# Altium PCB roneMotorBoard-v14.PcbDoc (part 1 of 2)
Units mil, origin at the board's own origin, x right, y up, seen from the top; angles counter-clockwise.
Board outline 3702 x 3936.38 mil, 2 copper layers (Top Layer, Bottom Layer); 104 components, 88 nets, 401 pads, 261 vias.
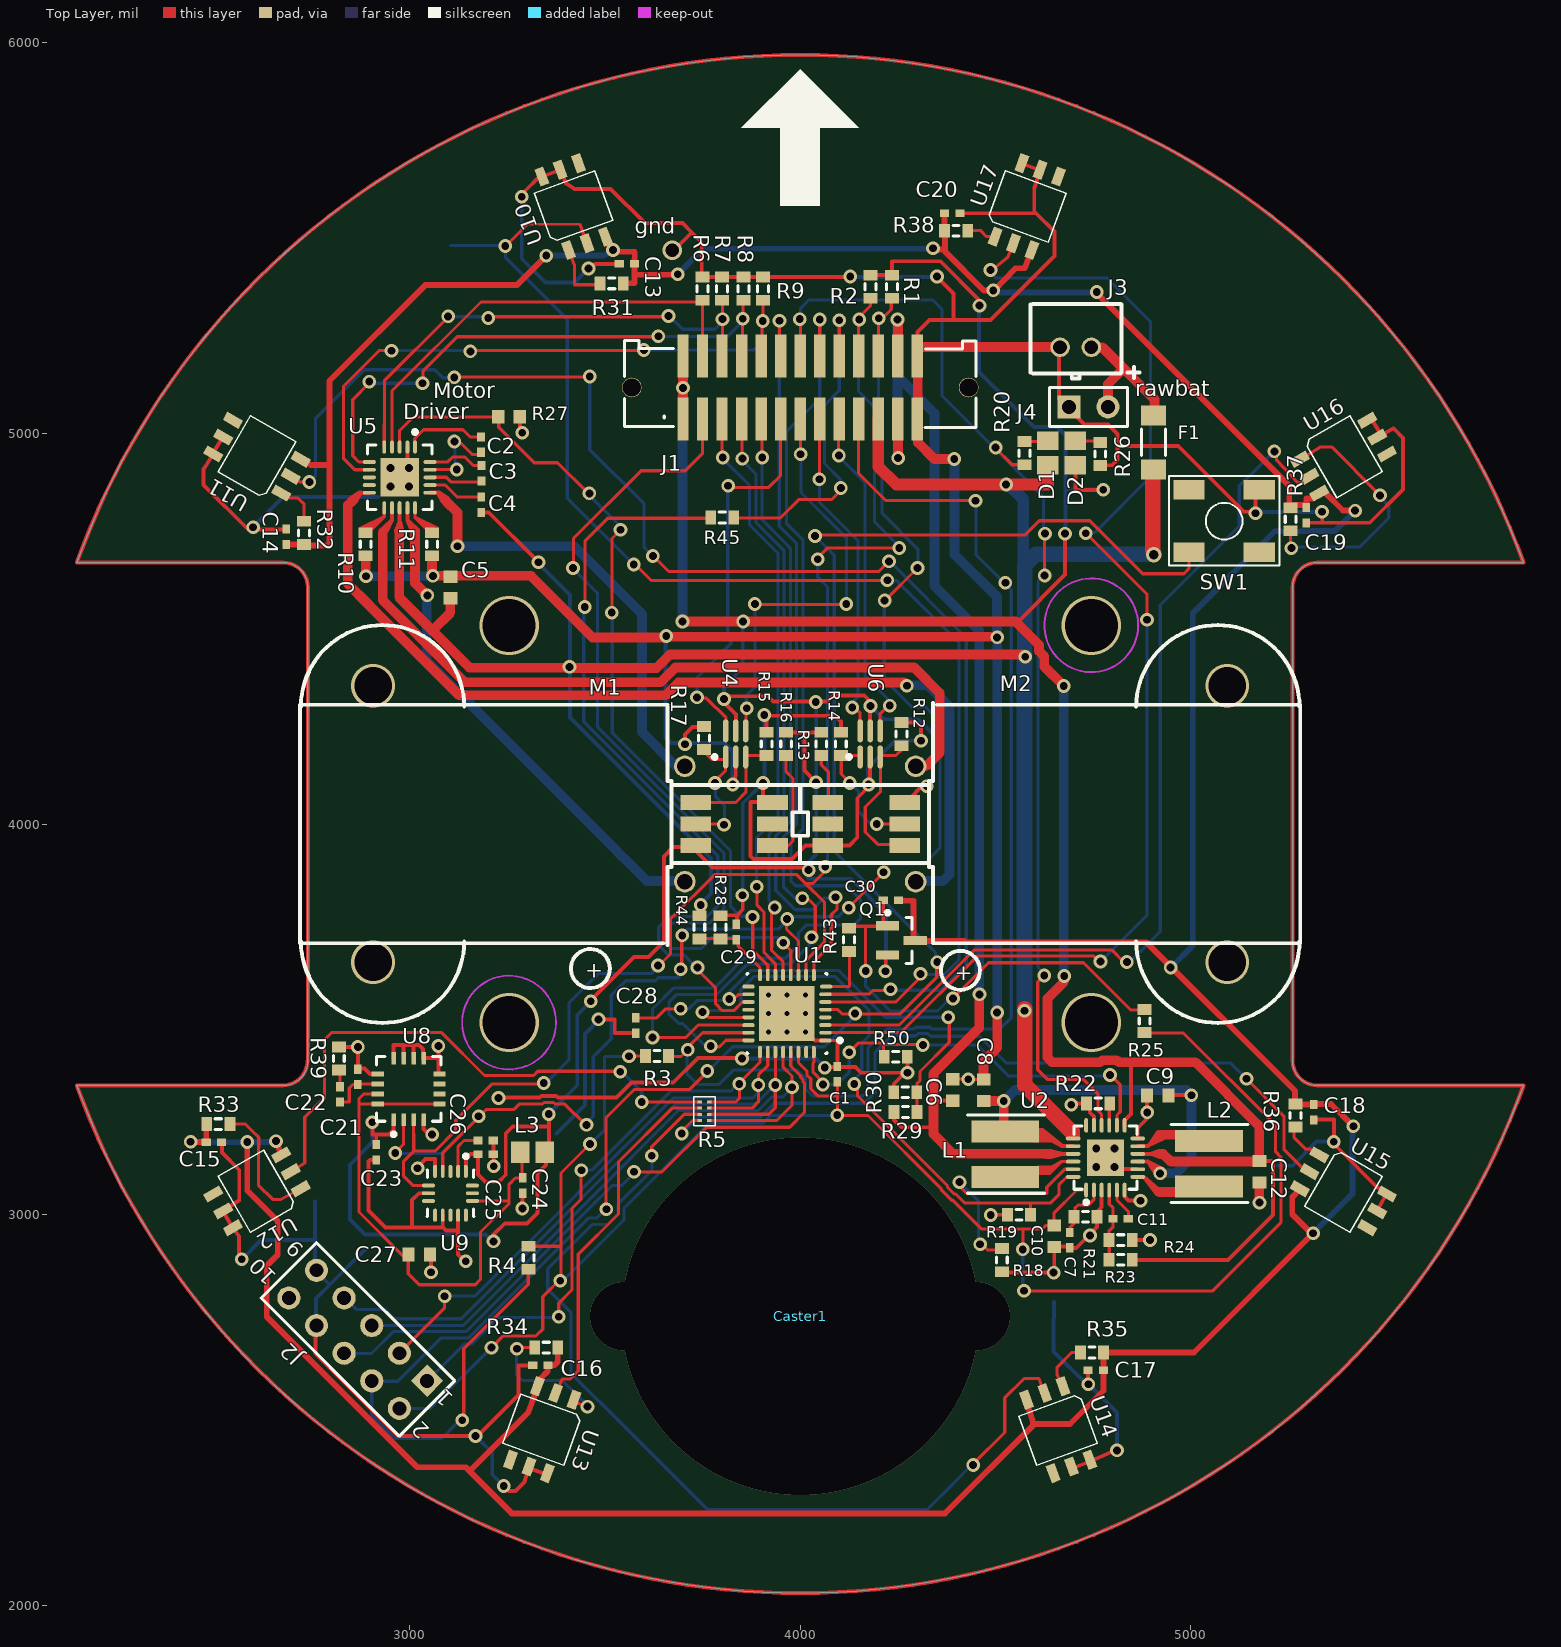
[diagram p0: Top Layer view]
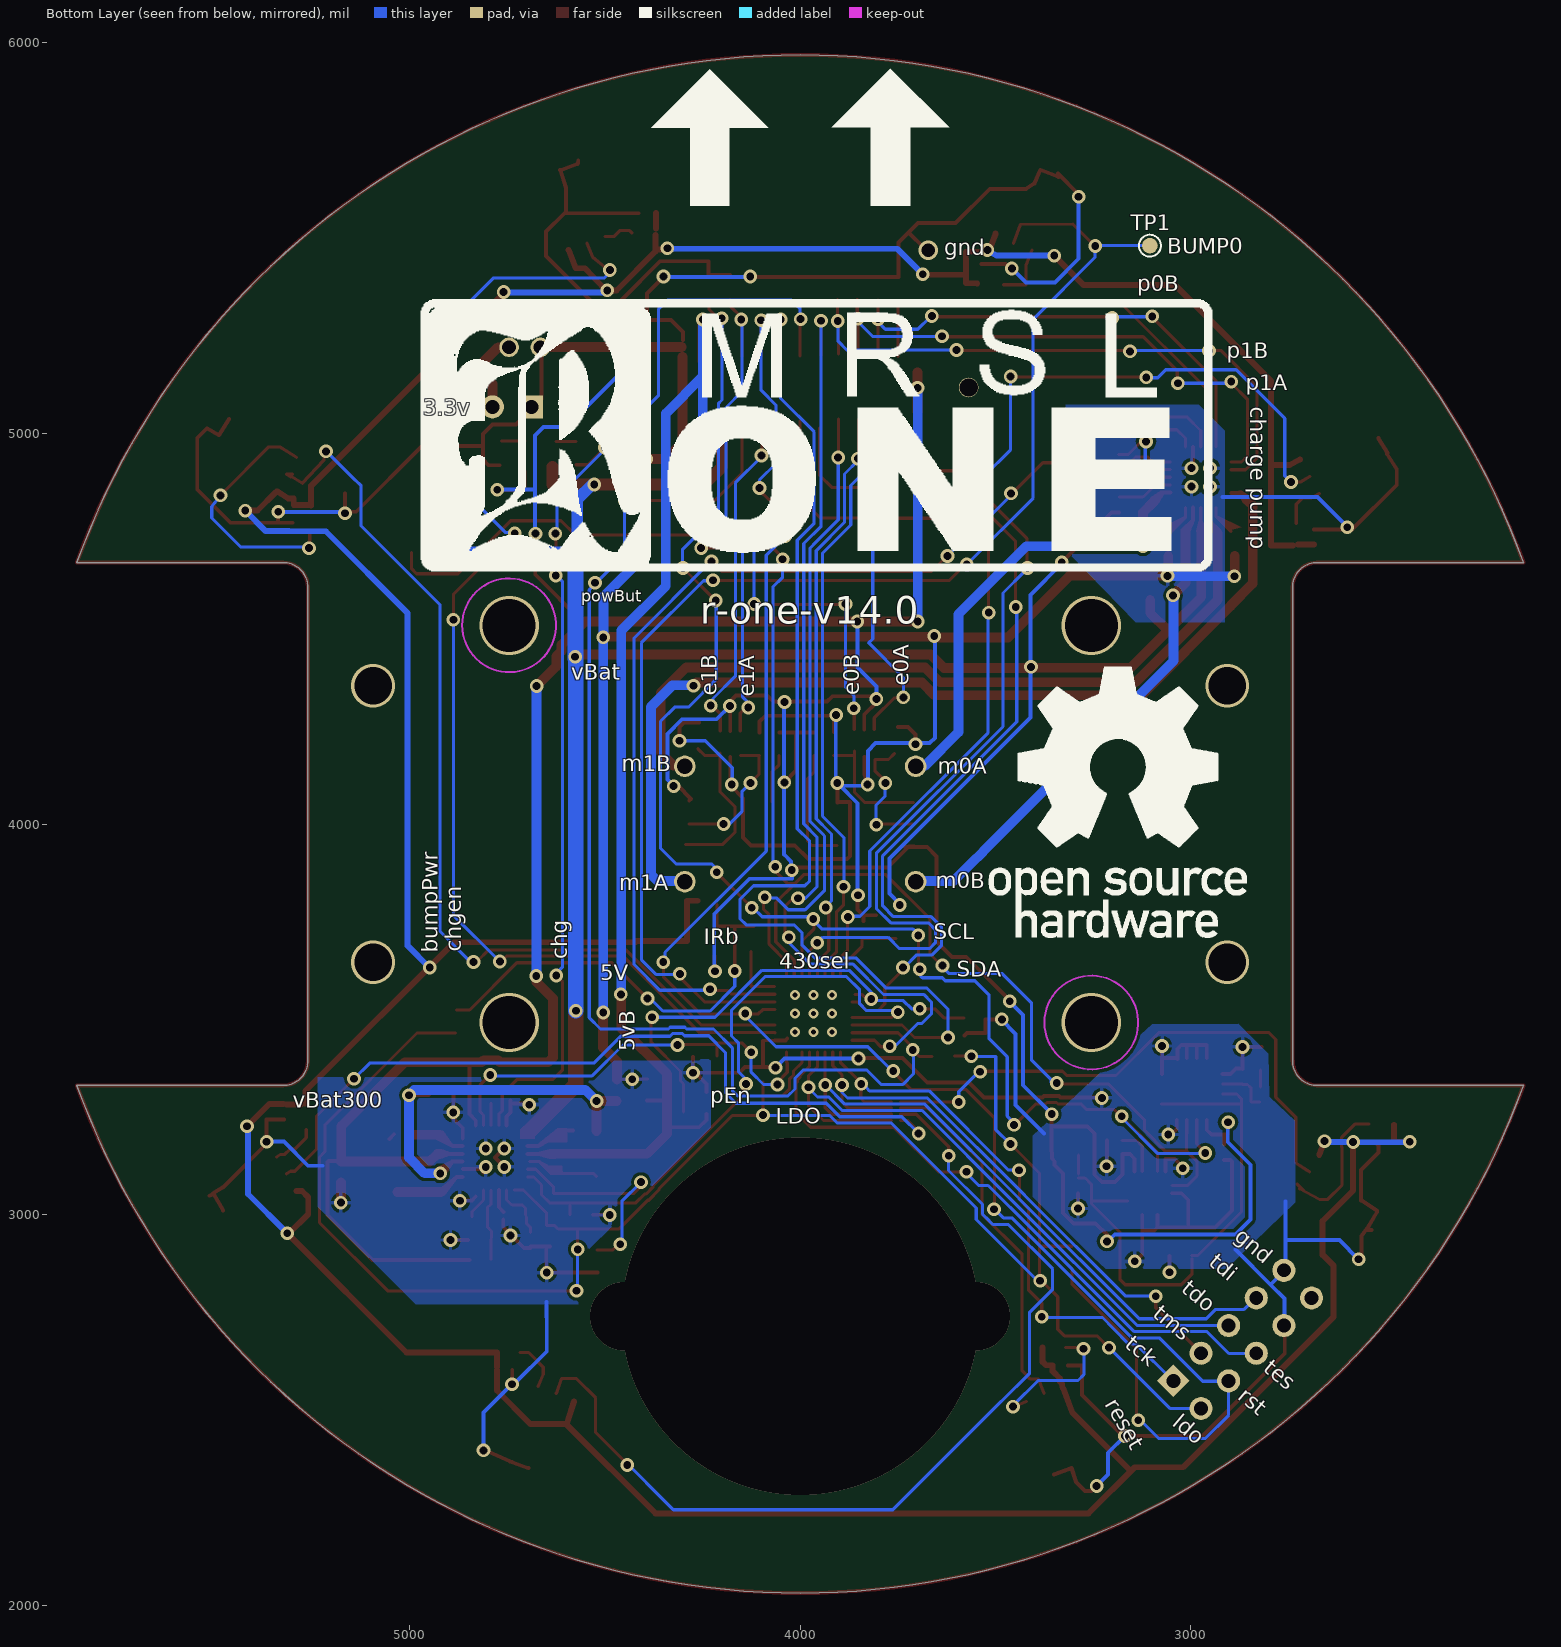
[diagram p1: Bottom Layer view, seen from below]

## Layer stack, top to bottom
Top Layer: signal copper 1.4
Dielectric: dielectric 12.6, FR-4, Dk 4.8
Bottom Layer: signal copper 1.4

## Board outline
2149,3331 2677,3331 ccw(c2677,3394) 2740,3394 2740,4606 ccw(c2677,4606) 2677,4669 2149,4669 cw(c4000,4000) 5851,4669 5323,4669 ccw(c5323,4606) 5260,4606 5260,3394 ccw(c5323,3394) 5323,3331 5851,3331 cw(c4000,4000)

## Design rules (kind name [scope] priority, off if disabled: settings)
Clearance [All] p1: gap=7.9
PolygonConnect [All] p1: connectstyle=Relief reliefconductorwidth=10 reliefentries=4 polygonreliefangle="90 Angle"
RoutingVias RoutingVias_4 [(IsVia AND InNetClass('All Nets'))] p1: holewidth=20 width=35 viastyle="Through Hole" minholewidth=20 minwidth=35 maxholewidth=20 maxwidth=35
RoutingVias RoutingVias_3 [(IsVia AND InNetClass('All Nets'))] p2: holewidth=20 width=35 viastyle="Through Hole" minholewidth=20 minwidth=35 maxholewidth=20 maxwidth=35
RoutingVias RoutingVias_2 [(IsVia AND InNetClass('All Nets'))] p3: holewidth=20 width=35 viastyle="Through Hole" minholewidth=20 minwidth=35 maxholewidth=20 maxwidth=35
RoutingVias RoutingVias_1 [(IsVia AND InNetClass('All Nets'))] p4: holewidth=20 width=35 viastyle="Through Hole" minholewidth=20 minwidth=35 maxholewidth=20 maxwidth=35
RoutingVias [All] p5: holewidth=20 width=35 viastyle="Through Hole" minholewidth=20 minwidth=35 maxholewidth=20 maxwidth=35
SMDNeckDown [All] p1: percent=50.000
SilkscreenOverComponentPads [All] p1: minsilkscreentomaskgap=10
SolderMaskExpansion [All] p1: expansion=4
Width "Schematic Width Constraint_1" [InNet('BUMP_PWR')] p1: maxlimit=15 minlimit=10 preferedwidth=15 minimp=50.000000 maximp=50.000000 favimp=50.000000
Width "Schematic Width Constraint_8" [InNet('3.3V')] p2: maxlimit=100 minlimit=10 preferedwidth=25 minimp=50.000000 maximp=50.000000 favimp=50.000000
Width "Schematic Width Constraint_7" [InNet('VBAT')] p3: maxlimit=50 minlimit=10 preferedwidth=25 minimp=50.000000 maximp=50.000000 favimp=50.000000
Width "Schematic Width Constraint_6" [InNet('VBAT +300')] p4: maxlimit=25 minlimit=10 preferedwidth=25 minimp=50.000000 maximp=50.000000 favimp=50.000000
Width "Schematic Width Constraint_5" [InNet('VBAT_IN')] p5: maxlimit=25 minlimit=10 preferedwidth=25 minimp=50.000000 maximp=50.000000 favimp=50.000000
Width "Schematic Width Constraint_4" [InNet('NetL2_1')] p6: maxlimit=25 minlimit=10 preferedwidth=25 minimp=50.000000 maximp=50.000000 favimp=50.000000
Width "Schematic Width Constraint_3" [InNet('NetL2_2')] p7: maxlimit=25 minlimit=10 preferedwidth=25 minimp=50.000000 maximp=50.000000 favimp=50.000000
Width "Schematic Width Constraint_2" [InNet('5VUSB')] p8: maxlimit=25 minlimit=10 preferedwidth=25 minimp=50.000000 maximp=50.000000 favimp=50.000000
Width "Schematic Width Constraint" [InNet('GND')] p9: maxlimit=25 minlimit=10 preferedwidth=25 minimp=50.000000 maximp=50.000000 favimp=50.000000
Width "Schematic Width Constraint_12" [InNet('MOT_0B')] p10: maxlimit=25 minlimit=10 preferedwidth=20 minimp=50.000000 maximp=50.000000 favimp=50.000000
Width "Schematic Width Constraint_11" [InNet('MOT_0A')] p11: maxlimit=25 minlimit=10 preferedwidth=20 minimp=50.000000 maximp=50.000000 favimp=50.000000
Width "Schematic Width Constraint_10" [InNet('MOT1_B')] p12: maxlimit=25 minlimit=10 preferedwidth=20 minimp=50.000000 maximp=50.000000 favimp=50.000000
Width "Schematic Width Constraint_9" [InNet('MOT1_A')] p13: maxlimit=25 minlimit=10 preferedwidth=20 minimp=50.000000 maximp=50.000000 favimp=50.000000
Width MotorWidth [InNetClass('MotorNets')] p14: maxlimit=25 minlimit=8 preferedwidth=25
Width [All] p15: maxlimit=8 minlimit=8 preferedwidth=8
27 further rules are at their usual default settings.

## Classes and differential pairs
component class motorEncoder: C2 C3 C4 C5 Caster1 CasterBack1 M1 M2 M? R6 R7 R8 R9 R10 R11 R12 R13 R14 R15 R16 R17 R27 U4 U5 U6
component class BumpSensors: C13 C14 C15 C16 C17 C18 C19 C20 C30 Q1 R25 R31 R32 R33 R34 R35 R36 R37 R38 R43 TP1 U10 U11 U12 U13 U14 U15 U16 U17
component class GyroAccel: C21 C22 C23 C24 C25 C26 C27 L3 R39 U8 U9
component class MSP430: C1 C28 C29 J1 J2 R1 R2 R3 R4 R5 R45 R50 SW1 U1
component class power: C6 C7 C8 C9 C10 C11 C12 D1 D2 F1 J3 J4 L1 L2 R18 R19 R20 R21 R22 R23 R24 R26 R28 R29 R30 R44 U2 U3

## Components (designator, comment, footprint, x,y, rotation, side; value= is the part's Value field where it differs from the comment)
C1 "Cap Semi" CAPC1005L 4095,3360 r270 top
C2 "Cap Semi" CAPC1005L 3183,4971 r90 top
C3 "Cap Semi" CAPC1005L 3184.31,4897.63 r90 top
C4 "Cap Semi" CAPC1005L 3184,4817 r90 top
C5 "Cap Semi" CAPC1608L 3105,4605 r270 top
C6 "Cap Semi" CAPC1608L 4390.5,3319.5 r270 top
C7 "Cap" CAPC1005L 4690,2935 r90 top
C8 "Cap" CAPC1608L 4469.5,3318.5 r270 top
C9 "Cap" CAPC1608L 4915,3305 r180 top
C10 "Cap" CAPC1608L 4650,2945 r270 top
C11 "Cap" CAPC1005L 4820,2990 r0 top
C12 "Cap" CAPC1608L 5175,3110 r90 top
C13 "Cap Semi" CAPC1005L 3556.5,5433.5 r0 top
C14 "Cap Semi" CAPC1005L 2685,4735 r270 top locked
C15 "Cap Semi" CAPC1005L 2499.5,3185.5 r180 top
C16 "Cap Semi" CAPC1005L 3335,2615 r0 top
C17 "Cap Semi" CAPC1005L 4756.5,2602.5 r0 top
C18 "Cap Semi" CAPC1005L 5314,3262.5 r90 top locked
C19 "Cap Semi" CAPC1005L 5295,4790 r90 top
C20 "Cap Semi" CAPC1005L 4389,5563 r180 top locked
C21 "Cap Semi" CAPC1005L 2868,3353 r90 top
C22 "Cap Semi" CAPC1005L 2822.5,3308 r90 top
C23 "Cap Semi" CAPC1005L 2915,3160 r90 top
C24 "Cap Semi" CAPC1005L 3290,3075 r90 top
C25 "Cap Semi" CAPC1005L 3195,3155 r180 top
C26 "Cap Semi" CAPC1005L 3195,3190 r180 top
C27 "Cap Semi" CAPC1608L 3025,2898 r180 top
C28 "Cap Semi" CAPC1005L 3579,3484.5 r90 top
C29 "Cap Semi" CAPC1005L 3836.5,3723.5 r270 top
C30 "Cap" CAPC1005L 4232,3805 r0 top
Caster1 "non connect" "3/4\"CASTER2" 4000,2740 r180 top locked
D1 "Charge" INDC2012L 4634,4949 r90 top
D2 "Power" INDC2012L 4704,4949 r90 top
F1 "PTC" ERJ8G-1206 4904,4976.5 r90 top
J1 "HCOMM/MOT" "HeaderSM 13x2" 4000,5117 r90 top locked
J2 "JTAG" HDR2X5 3045,2575 r135 top locked
J3 "Bat" BatteryConnJST 4705,5220 r180 top
J4 "3.3V conn" HDR1X2 4687.5,5067.5 r0 top
L1 "3.3uH" IndPow 4525,3155 r90 top
L2 "2.2uH" IndPow 5046,3131 r90 top
L3 "Inductor" INDC2012L 3315,3160 r0 top
M1 "motorEncoder_V7b" motorEncoder_V7b 3830,4000 r180 top locked
M2 "motorEncoder_V7b" motorEncoder_V7b 4170,4000 r0 top locked
Q1 "MOSFET-P" SOT-23 4259,3702 r0 top
R1 "Res3" RESC1608L 4235,5375 r90 top
R2 "Res3" RESC1608L 4180,5375 r90 top
R3 "Res3" RESC1608L 3633.5,3406.5 r180 top
R4 "Res3" RESC1608L 3305,2890 r90 top
R5 "4-res array" "4-RES ARRAY" 3755,3265 r180 top
R6 "Res3" RESC1608L 3750,5370 r90 top
R7 "Res3" RESC1608L 3800,5370 r90 top
R8 "Res3" RESC1608L 3855,5370 r90 top
R9 "Res3" RESC1608L 3905,5370 r90 top
R10 "Res3" RESC1608L 2888,4716 r270 top
R11 "Res3" RESC1608L 3058,4716 r270 top
R12 "" RESC1608L 4259,4230 r270 top
R13 "" RESC1608L 4054,4205 r90 top
R14 "" RESC1608L 4104,4205 r270 top
R15 "" RESC1608L 3914,4205 r90 top
R16 "" RESC1608L 3964,4205 r90 top
R17 "" RESC1608L 3754,4220 r270 top
R18 "Res3" RESC1608L 4516,2884 r90 top
R19 "Res3" RESC1608L 4560,3000 r0 top
R20 "Res3" RESC1608L 4574,4949 r90 top
R21 "Res3" RESC1608L 4730,2995 r180 top
R22 "Res3" RESC1608L 4762.5,3285 r180 top
R23 "Res3" RESC1608L 4820,2885 r180 top
R24 "Res3" RESC1608L 4820,2935 r0 top
R25 "Res3" J1-0603 4881.5,3496 r90 top
R26 "Res3" RESC1608L 4768,4947 r90 top
R27 "Res3" CAPC1608L 3255,5042 r0 top
R28 "Res3" RESC1608L 3796,3735.5 r270 top
R29 "Res3" RESC1608L 4269.5,3263 r180 top
R30 "Res3" RESC1608L 4269,3313.5 r0 top
R31 "Res3" RESC1608L 3517.5,5383.5 r0 top
R32 "Res3" RESC1608L 2730,4745 r270 top
R33 "Res3" RESC1608L 2511,3232 r180 top
R34 "Res3" RESC1608L 3350,2660 r0 top
R35 "Res3" RESC1608L 4746.5,2647.5 r0 top
R36 "Res3" RESC1608L 5267.5,3254 r90 top locked
R37 "Res3" RESC1608L 5255,4780 r90 top
R38 "Res3" RESC1608L 4399,5518 r180 top locked
R39 "Res3" RESC1608L 2819.5,3400 r270 top
R43 "Res3" J1-0603 4125,3703.5 r90 top
R44 "Res3" RESC1608L 3742,3735.5 r90 top
R45 "" J1-0603 3800.5,4784.5 r0 top
R50 "Res3" RESC1608L 4244.5,3404.5 r180 top
SW1 "reset button" SwitchTall-TL330 5085,4775 r0 top
TP1 "TestPoint" TestPoint 3105,5480 r180 bottom
U1 "MSP430" MSP430_32PIN 3966,3515 r180 top locked
U2 "LTC3566" QFN-24 4781,3146 r90 top
U4 "schmit trigger" DCK(R-PDSO-C6) 3835,4205 r90 top
U5 "MOTOR-A3906" QFN-20 2975,4887 r270 top locked
U6 "schmit trigger" DCK(R-PDSO-C6) 4179,4205 r90 top
U8 "L3G4200D" L3G2004D 2998,3322 r90 top locked
U9 "MMA8452Q" MMA8452Q 3105,3055 r270 top locked
U10 "SFH9240-Z" SFH9240-Z 3420,5580 r110 top locked
U11 "SFH9240-Z" SFH9240-Z 2610,4940 r150 top locked
U12 "SFH9240-Z" SFH9240-Z 2610,3060 r210 top locked
U13 "SFH9240-Z" SFH9240-Z 3340,2450 r250 top locked
U14 "SFH9240-Z" SFH9240-Z 4660,2450 r290 top locked
U15 "SFH9240-Z" SFH9240-Z 5390,3060 r330 top locked
U16 "SFH9240-Z" SFH9240-Z 5390,4940 r30 top locked
U17 "SFH9240-Z" SFH9240-Z 4580,5580 r70 top locked

## Footprints (in the part's own frame and the unit in brackets; to place one, negate y for a bottom-side part, rotate by r counter-clockwise, add the part's x,y. Pads: shape width x height; smd on the part's side, far side on the other; paste and mask are expansions set on the pad)
"3/4\"CASTER2" [mil] "3/4\" caster for board"
"4-RES ARRAY" [mm]
  rect 0.3x0.2 smd mask+0.05: 1(-0.3,0.6) 2(-0.3,0.2) 3(-0.3,-0.2) 4(-0.3,-0.6) 5(0.3,-0.6) 6(0.3,-0.2) 7(0.3,0.2) 8(0.3,0.6)
  silkscreen extent -0.71,-0.94 0.69,0.94
BatteryConnJST [mil] "Connector for Battery"
  round 50 hole 35: 1(-40,0) 2(40,0)
  silkscreen extent -163,-110 116,80
CAPC1005L [mm] "Chip Capacitor, Body 1.0x0.5mm, IPC High Density"
  rect 0.6x0.5 smd: 1(-0.5,0) 2(0.5,0)
  body extent -0.55,-0.3 0.55,0.3, height 1.3
CAPC1608L [mm] "Chip Capacitor, Body 1.6x0.8mm, IPC High Density"
  rect 0.8x0.9 smd: 1(-0.7,0) 2(0.7,0)
  body extent -0.87,-0.48 0.87,0.48, height 1.3
DCK(R-PDSO-C6) [mm] "TSOP, 6-Leads, Body 2.2x1.4mm (max), Pitch 0.65mm, IPC Medium Density"
  oval 1.5x0.35 smd: 1(-0.85,0.65) 2(-0.85,0) 3(-0.85,-0.65) 4(0.85,-0.65) 5(0.85,0) 6(0.85,0.65)
  silkscreen extent -0.97,1.25 -0.73,1.5, body extent -0.7,-1.07 0.7,1.08, height 1.1
ERJ8G-1206 [mm] "Chip Resistor, Body 3.2x1.6mm, IPC High Density"
  rect 1.3x1.6 smd: 1(-1.75,0) 2(1.75,0)
  silkscreen extent -0.86,-0.79 0.86,0.79, body extent -1.6,-0.79 1.6,0.79, height 0.9
HDR1X2 [mm] "Connector; Header; 2 Position"
  rect 1.5x1.5 hole 0.9: 1(0,0)
  round 1.5 hole 0.9: 2(2.54,0)
  silkscreen extent -1.27,-1.27 3.81,1.27
HDR2X5 [mm] "Connector; Header; 5x2 Position"
  rect 1.5x1.5 hole 0.9: 1(0,0)
  round 1.5 hole 0.9: 2(0,2.54) 3(2.54,0) 4(2.54,2.54) 5(5.08,0) 6(5.08,2.54) 7(7.62,0) 8(7.62,2.54) 9(10.16,0) 10(10.16,2.54)
  silkscreen extent -1.27,-1.27 11.43,3.81
"HeaderSM 13x2" [mm]
  rect 2.795x0.74 smd: 1(-2.032,7.62) 2(2.033,7.62) 3(-2.032,6.35) 4(2.033,6.35) 5(-2.032,5.08) 6(2.033,5.08) 7(-2.032,3.81) 8(2.033,3.81) 9(-2.032,2.54) 10(2.033,2.54) 11(-2.032,1.27) 12(2.033,1.27) 13(-2.032,0) 14(2.033,0) 15(-2.032,-1.27) 16(2.033,-1.27) 17(-2.032,-2.54) 18(2.033,-2.54) 19(-2.032,-3.81) 20(2.033,-3.81) 21(-2.032,-5.08) 22(2.033,-5.08) 23(-2.032,-6.35) 24(2.033,-6.35) 25(-2.032,-7.62) 26(2.033,-7.62)
  round 1.27 hole 1.19: c1(0,10.947) c2(0,-10.947)
  silkscreen extent -2.59,-11.43 3.06,11.43
INDC2012L [mm] "Chip Inductor, Body 2.0x1.2mm, IPC High Density"
  rect 1.2x1.4 smd: 1(-0.8,0) 2(0.8,0)
  body extent -1.1,-0.7 1.1,0.7, height 0.55
IndPow [mil]
  rect 56.5x173 smd: 1(-58.25,0) 2(58.25,0)
  silkscreen extent -100,-100 100,97
J1-0603 [mm] "Chip Resistor, Body 1.6x0.8mm, IPC High Density"
  rect 0.7x0.9 smd: 1(-0.75,0) 2(0.75,0)
  silkscreen extent -0.2,-0.35 0.2,0.35, body extent -0.85,-0.48 0.85,0.48, height 0.9
L3G2004D [mm] "gyroscope"
  rect 0.8x0.3 smd: 1(-2,0.975) 2(-2,0.325) 3(-2,-0.325) 4(-2,-0.975) 9(2,-0.975) 10(2,-0.325) 11(2,0.325) 12(2,0.975)
  rect 0.3x0.8 smd: 5(-0.975,-2) 6(-0.325,-2) 7(0.325,-2) 8(0.975,-2) 13(0.975,2) 14(0.325,2) 15(-0.325,2) 16(-0.975,2)
  silkscreen extent -3.07,-2.1 2.1,2.1, body extent -2.08,-2.08 2.07,2.07, height 1.1
MMA8452Q [mm] "accelerometer-v9"
  oval 0.85x0.25 smd: 1(-1.425,1) 2(-1.425,0.5) 3(-1.425,0) 4(-1.425,-0.5) 5(-1.425,-1) 9(1.425,-1) 10(1.425,-0.5) 11(1.425,0) 12(1.425,0.5) 13(1.425,1)
  oval 0.25x0.85 smd: 6(-0.5,-1.425) 7(0,-1.425) 8(0.5,-1.425) 14(0.5,1.425) 15(0,1.425) 16(-0.5,1.425)
  silkscreen extent -2.52,-1.52 1.5,1.53, body extent -1.5,-1.5 1.5,1.5, height 1
motorEncoder_V7b [mm] "Precision Wire Wound Inductor, 2-Leads, Body 2.5x2.3mm, IPC Medium Density"
  rect 2x1 smd: A(-2.524,1.4) C(2.476,1.4) E1(2.476,0) E2(2.476,-1.4) K(-2.524,-1.4) NC(-2.524,0)
  round 1.4 hole 1: M1(3.185,3.75) M2(3.185,-3.75)
  Mechanical 1 keep-out region: 4.496,-7.849 28.118,-7.849 28.118,7.645 4.496,7.645
  silkscreen extent -4.83,-12.93 28.18,12.93
MSP430_32PIN [mm] "32 pin QFN"
  oval 0.8x0.25 smd: 1(-2.5,1.75) 2(-2.5,1.25) 3(-2.5,0.75) 4(-2.5,0.25) 5(-2.5,-0.25) 6(-2.5,-0.75) 7(-2.5,-1.25) 8(-2.553,-1.75) 17(2.5,-1.75) 18(2.5,-1.25) 19(2.5,-0.75) 20(2.5,-0.25) 21(2.5,0.25) 22(2.5,0.75) 23(2.5,1.25) 24(2.5,1.75)
  oval 0.25x0.8 smd: 9(-1.75,-2.5) 10(-1.25,-2.5) 11(-0.75,-2.5) 12(-0.25,-2.5) 13(0.25,-2.5) 14(0.75,-2.5) 15(1.25,-2.5) 16(1.75,-2.5) 25(1.75,2.5) 26(1.25,2.5) 27(0.75,2.5) 28(0.25,2.5) 29(-0.25,2.5) 30(-0.75,2.5) 31(-1.25,2.5) 32(-1.75,2.5)
  rect 3.6x3.6 smd: 33(0,0)
  silkscreen extent -3.58,-2.6 2.6,2.6, body extent -2.58,-2.57 2.57,2.58, height 1
QFN-20 [mm] "QFN, 20-Leads, Body 4.2x4.2mm (max), Pitch 0.50mm, IPC Medium Density"
  oval 0.85x0.25 smd: 1(-1.975,1) 2(-1.975,0.5) 3(-1.975,0) 4(-1.975,-0.5) 5(-1.975,-1) 11(1.975,-1) 12(1.975,-0.5) 13(1.975,0) 14(1.975,0.5) 15(1.975,1)
  oval 0.25x0.85 smd: 6(-1,-1.975) 7(-0.5,-1.975) 8(0,-1.975) 9(0.5,-1.975) 10(1,-1.975) 16(1,1.975) 17(0.5,1.975) 18(0,1.975) 19(-0.5,1.975) 20(-1,1.975)
  rect 2.5x2.5 smd: 21(0,0)
  silkscreen extent -3.07,-2.1 2.1,2.1, body extent -2.07,-2.07 2.07,2.07, height 0.8
QFN-24 [mm] "QFN, 24-Leads, Body 4.1x4.1mm (max), Pitch 0.50mm, IPC Medium Density"
  oval 0.95x0.25 smd: 1(-2.1,1.25) 2(-2.1,0.75) 3(-2.1,0.25) 4(-2.1,-0.25) 5(-2.1,-0.75) 6(-2.1,-1.25) 13(2.1,-1.25) 14(2.1,-0.75) 15(2.1,-0.25) 16(2.1,0.25) 17(2.1,0.75) 18(2.1,1.25)
  oval 0.25x0.95 smd: 7(-1.25,-2.1) 8(-0.75,-2.1) 9(-0.25,-2.1) 10(0.25,-2.1) 11(0.75,-2.1) 12(1.25,-2.1) 19(1.25,2.1) 20(0.75,2.1) 21(0.25,2.1) 22(-0.25,2.1) 23(-0.75,2.1) 24(-1.25,2.1)
  rect 2.4x2.4 smd: 25(0,0)
  silkscreen extent -3.02,-2.05 2.05,2.05, body extent -2.05,-2.05 2.05,2.05, height 0.8
RESC1608L [mm] "Chip Resistor, Body 1.6x0.8mm, IPC High Density"
  rect 0.7x0.9 smd: 1(-0.75,0) 2(0.75,0)
  silkscreen extent -0.2,-0.35 0.2,0.35, body extent -0.85,-0.48 0.85,0.48, height 0.9
SFH9240-Z [mil] "Reflective Interrupter with Schmitt-Trigger"
  rect 47x24 smd: 1(-100,50) 2(-100,0) 3(-100,-50) 4(100,-50) 5(100,0) 6(100,50)
  silkscreen extent -67,-83 67,83, body extent -59,-78 59,79, height 67
SOT-23 [mm] "SOT23, 3-Leads, Body 3.0x2.5mm (max), Pitch 0.95mm, IPC Medium Density"
  rect 1.5x0.6 smd: 1(-0.9,0.95) 2(-0.9,-0.95) 3(0.9,0)
  silkscreen extent -1.02,-1.5 0.7,1.92, body extent -0.7,-1.5 0.7,1.5, height 1.2
SwitchTall-TL330 [mil] "Small SMDTall Tact Switch E-Switch TL330"
  rect 80x50 smd: 1(-90,80) 2(90,80) 3(-90,-80) 4(90,-80)
  silkscreen extent -141,-114 141,115
TestPoint [mil]
  round 40 smd: 1(0,0)
  silkscreen extent -28,-28 28,28

## Part data
C1 C2 C3 C4 C5 C6 C13 C14 C15 C16 C17 C18 C19 C20 C21 C22 C23 C24 C25 C26 C27 C28 C29: "Capacitor (Semiconductor SIM Model)"
C7 C8 C9 C10 C11 C12 C30: "Capacitor"
Caster1: library part "Caster 3/4in", "This is just a space saver to get the caster onto the pcb"
D1 D2: library part LED2, "Typical RED, GREEN, YELLOW, AMBER GaAs LED"
F1: library part PTC_FUSE, "Fuse"
J1: library part HCOMM/HMOT, "Header, 2X20, 50mil, IDC"
J2: library part "Header 5X2", "Header, 5-Pin, Dual row"
J3: library part BatteryConnJST
J4: library part "Header 2", "Header, 2-Pin"
L1 L2: library part Inductor
Q1: "P-Channel MOSFET"
R1 R2 R3 R4 R6 R7 R8 R9 R10 R11 R18 R19 R20 R21 R22 R23 R24 R25 R26 R27 R28 R29 R30 R31 R32 R33 R34 R35 R36 R37 R38 R39 R43 R44 R50: "Resistor"
R5: library part "4 Res Array"
R12 R13 R14 R15 R16 R17 R45: library part Res3, "Resistor"
SW1: library part Switch-TL330
U1: library part MSP430_32pin
U8: "3axis gyroscope, SPI"

## Via types
v1: diameter 35, hole 20, Top Layer to Bottom Layer, tented bottom, 231 vias
v2: diameter 25.98, hole 12.99, Top Layer to Bottom Layer, tented both sides, 9 vias
v3: diameter 35, hole 20, Top Layer to Bottom Layer, tented both sides, 8 vias
v4: diameter 152, hole 136, Top Layer to Bottom Layer, tented bottom, 4 vias
v5: diameter 112, hole 96, Top Layer to Bottom Layer, tented bottom, 4 vias
v6: diameter 175, hole 175, Top Layer to Bottom Layer, tented bottom, 2 vias
v7: diameter 40, hole 25, Top Layer to Bottom Layer, tented bottom, 1 vias
v8: diameter 50, hole 35, Top Layer to Bottom Layer, tented bottom, 1 vias
v9: diameter 915, hole 915, Top Layer to Bottom Layer, tented bottom, 1 vias

## Nets (pads, with @x,y where several pads share a name; then routed paths per layer and width w, separated by ;. In a path a pad name is that pad's centre, name@x,y a point inside that pad or via, vN(x,y) a via of type N, cw(c..) or ccw(c..) an arc to the next point about the centre after c; other vN are vias at no path point)
3.3LDO: C1.2 C10.1 J2.2 R3.2 R4.2 R25.1 U1.30 U2.1 | length 4945
  Top Layer w8: v1@3209.25,2658.75 3240.5,2690 3324,2690 3341,2707 3341,2790 3388,2837 3388,3107 v1(3462,3181) ; R4.2@3305,2919.53 3385.03,2919.53 ; v1@3569,3406 R3.2@3604.5,3406 ; U1.30@3995.53,3416.57 3995.53,3389.47 4017.2,3367.8 4017.2,3357.75 4027,3347.95 4027,3322.92 4046.42,3303.5 4093.5,3303.5 ; v1@4095.5,3254 4173.5,3254 4361.2,3066.3 ; v1@4095.5,3255 4095.5,3315.5 ; 4095.5,3316 C1.2@4095.5,3339 ; 4361.2,3063.74 4387.74,3037.2 ; 4390.3,3037.2 4463.5,2964 4620,2964 4629,2973 4649,2973 4649,3004 4708.48,3063.48 U2.1@4731.79,3063.48 ; 4570,2964 4570,2919.5 v1@4576.5,2913 ; v1(4572.5,2805.5) 4573.5,2804.5 5054.5,2804.5 5230,2980 5230,3147.5 5216.5,3161 5216.5,3229 4980.5,3465 R25.1@4882,3465
  Bottom Layer w8: J2.2@2977.5,2504.5 3054,2504.5 v1@3209.5,2660 ; v1@3386.25,2835.75 3397.25,2835.75 3549.5,2988 3549.5,3017.5 3767,3235 3905.6,3235 3925.1,3254.5 v1@4101.5,3254.5 ; v1@3464,3182.5 3499.5,3218 3499.5,3405.5 v1(3562,3405.5) ; v1@4569.5,2808 v1@4569.5,2911
  other v1: 3210,2660 3386,2831 4569.5,2911.5 4095,3255
3.3V: C12.2 C23.2 C25.2 D2.1 J1.1 J1.2 L3.2 M1.C M2.C Q1.2 R1.2 R2.2 R13.2 R16.2 R23.1 U2.10 U2.13 U4.5 U6.5 U8.1 U9.1 | length 11204.2
  Top Layer w10: v1@2906,3237 2906,3205 2948,3205 2959.61,3216.61 U8.1@2959.61,3243.26 ; C23.2@2915,3179.69 2915,3203 ; U9.1@3144.37,3111.1 3144.37,3143.37 3156,3155 C25.2@3175,3155 ; C25.2@3175.31,3155 3175.31,3103.19 3194.5,3084 3228,3084 3246.5,3102.5 3246.5,3208 3264.5,3226 3357,3226 ; v1@3214,2935 3214,2948 3244,2978 3301,2978 3328,3005 3328,3106 3349,3127 3349,3137 3355.5,3143.5 L3.2@3355.5,3159 ; L3.2@3357,3162 3357,3226 ; v1@3357,3258.5 3357,3226 ; v1@3466,3550.5 3575,3659.5 3611.5,3659.5 3651,3699 3651,3917 3674.88,3940.88 M1.C@3723.62,3940.88 ; M1.C@3708.31,3943 M1.C@3721.5,3943 ; M1.C@3732.56,3940.88 M1.C@3723.62,3940.88 ; v1(3805,4320) 3805,4310.87 3836,4279.87 U4.5@3836,4241.46 ; v1@3808,4327 3917,4327 3931,4313 4009,4313 ; R16.2@3964,4234.53 4010.5,4234.53 ; v1@4010,3888.5 3776,3888.5 M1.C@3723.62,3940.88 ; 4010,4313 4069,4313 4085,4329 4164,4329 4178,4315 v1@4178,4302 ; v1(4040.5,4106.5) 4010.5,4136.5 4010.5,4234.53 ; R13.2@4052.53,4234.53 4010.5,4234.53 ; U6.5@4179,4238.46 v1@4179,4302 ; R2.2@4180,5404.53 R1.2@4230.47,5404.53 ; v1@4219,3617.5 Q1.2@4219,3662 ; R1.2@4230.53,5399.53 R1.2@4240,5399.53 ; R1.2@4235,5405.5 4235,5440 4359,5440 4459,5340 v1@4459,5327.5 ; M2.C@4284,4060 4279.5,4064.5 4313,4098 v1@4323,4098 ; 4554.8,4514.8 4678,4638 v1@4678,4743 ; D2.1@4705,4902 4705,4855 v1@4774.5,4855 ; U2.13@4830.21,3228.68 4830.21,3241.71 4846.5,3258 4846.5,3387 ; R23.1@4846.5,2884 5095,2884 5210,2999 5210,3135.33 ; U2.10@4863.68,3156 4921,3156 ; C12.2@5175,3137.56 5207.77,3137.56
  Top Layer w25: v1(3699,4518) v1(3854,4518) 4551.61,4518 ; J1.1@3700,5055 v1(3700,5116) J1.2@3700,5156 ; 4554.8,4514.8 4611.15,4458.46 4611.15,4442.18 4624.5,4428.83 4624.5,4403 v1(4674.5,4353) ; v1@4674.5,3608.5 4674.5,3595.5 4632.5,3553.5 4632.5,3402.65 4644.65,3390.5 4768,3390.5 4773.1,3395.6 4784.93,3395.6 ; 4785.03,3395.5 4810.1,3395.5 4815.1,3390.5 5011.22,3390.5 5174,3227.72 ; 4921,3156 4928.28,3156 4948.28,3136 C12.2@5175,3136 ; C12.2@5174.5,3138.06 5174.5,3224.5
  Bottom Layer w10: v1@2900,3239 2906,3233 2906,3186 2848,3128 2848,2988 2886,2950 3195,2950 v1@3213.5,2931.5 ; v1@3357,3250.5 3357,3259 3429.5,3331.5 3429.5,3511 v1@3464,3545.5 ; v1@3699,4520 v1@3705,4520 ; v1@3805,4326 3805,4352 3853,4400 v1@3853,4511 ; v1(4021.5,3882) 4021.5,3860 4129.5,3860 4220,3769.5 v1@4220,3634 ; v1@4023.1,3885.1 4023.1,3904.09 4040.91,3921.9 ; 4041,3921.9 v1@4041,4311.5 ; v1(4180,4302) 4214,4268 4302,4268 4340,4230 4340,4114 v1@4325,4099 ; v1@4457.5,5335.5 4457.5,5156.5 4598,5016 4657,5016 4679,4994 v1@4679,4738.5 ; 4680.5,4855.5 v1(4775.5,4855.5)
  Bottom Layer w25: v1@3699,4520 v1@3699,5115 ; v1@4674.5,3611 v1(4674.5,4353)
  other v1: 3215,2932 2905,3237 3356.5,3257.5 3464,3546.5 4675.5,3611 4218,3623 4324,4097 4040,4312 4677.5,4743 4459,5326.5
5VUSB: C6.2 J1.23 J1.24 R29.2 U2.21 | length 3174.6
  Top Layer w10: R29.2@4240,3257.5 4240,3242.5 4258.5,3224 4341,3224 ; 4344,3292 C6.2@4392.69,3292 ; 4641,3156 U2.21@4698.32,3156
  Top Layer w25: J1.24@4250,5184 J1.24@4250,5197.02 v1@4250,5289 ; v1(4250.5,4936.5) J1.23@4250.5,5032.5 ; v1@4458,3559 4458,3478 4341,3361 4341,3224 4341,3206.5 4391.5,3156 4641,3156
  Bottom Layer w25: v1@4249,5290 4249,5146 ; v1(4250.5,4936.5) 4249,5146 ; v1@4458,3564 4458,4495 4344,4609 4344,5051 4249,5146
  other v1: 4459,3564 4249,5291
5VUSB_SENSE: C28.2 R29.1 R30.2 U1.18 | length 1215
  Top Layer w8: C28.2@3581,3504 3632.5,3504 3655.5,3527 v1(3694,3527) ; v1(3818.26,3552) 3830,3552 3841.5,3563.5 U1.18@3859,3563.5 ; R30.2@4298.53,3313.5 4298.53,3335.03 4306.5,3343 4306.5,3366.5 4381.5,3441.5 v1@4381.5,3505.5 ; R29.1@4299.03,3263 R30.2@4299.03,3309.97
  Bottom Layer w8: v1(3694,3527) 3715,3527 3736,3548 v1@3811.5,3548 ; v1@3818.5,3555.5 3818.5,3569.5 3874.5,3625.5 4098,3625.5 4218,3505.5 v1(4379,3505.5)
BUMP0: TP1.1 U1.6 U10.2 | length 3455.9
  Top Layer w8: v1@3255,5488 3302,5535 3436.5,5534.5 U10.2@3454.2,5486.03 ; v1@3573.25,4668.25 3618.5,4623 4220,4623 v1@4226,4629 ; U1.6@4064.45,3544.5 4154.16,3544.5 ; 4154.19,3544.53 4244.53,3544.53 v1@4308,3608
  Bottom Layer w8: TP1.1@3105,5480 v1@3244,5480 ; v1@3245.5,5470.5 3245.5,5450 3404,5291.5 3404,4834 v1(3574,4664) ; v1@4226,4629 4232.5,4622.5 4247.5,4622.5 4406.5,4463.5 4406.5,3653 4368,3614.5 v1@4304,3614.5
  other v1: 4308,3616.5 4223,4624 3245,5479
BUMP1: U1.7 U11.2 | length 3649.6
  Top Layer w8: U11.2@2696,4888.96 2720,4875 v1(2744,4875) ; v1@3111,5144 v1@3467,5144 ; v1@3623,4687 3664,4646 4201,4646 v1(4227,4672) ; U1.7@4064.43,3564.21 4137.21,3564.21 ; 4137.5,3564.5 4176,3564.5 4185.5,3574 v1@4215.5,3574
  Bottom Layer w8: v1(2744,4875) 2760,4891 2760,5038 2884.5,5162.5 3064.5,5162.5 3085,5142 v1@3111.5,5142 ; v1(3461.5,5145) 3461.5,4958 3600,4820.5 3600,4709 v1(3623,4686) ; v1@4217,3574.5 4359,3574.5 4425,3640.5 4425,4476 v1@4229,4672
  other v1: 4231,3577 3114.5,5143
BUMP2: R5.5 U12.2 | length 1442.7
  Top Layer w8: U12.2@2696.6,3110 2701.81,3113.31 2732,3132.5 2732,3250 2783,3301 2783,3448.5 2800.5,3466 3082.5,3466 3192,3356.5 3318,3356.5 3328.64,3367.14 v1@3538.5,3367.14 ; v1(3594.38,3288.62) R5.5@3743.19,3288.62
  Bottom Layer w8: v1@3540.75,3368.75 3594.38,3315.12 v1(3594.38,3288.62)
  other v1: 3539.5,3366
BUMP3: R5.6 U13.2 | length 932
  Top Layer w8: U13.2@3375.89,2543.31 3390,2579.5 3411,2579.5 3432,2600.5 3432,2899 3535,3002 3535,3135 3672.87,3272.87 R5.6@3743.19,3272.87
BUMP4: R5.7 U14.2 | length 2460.6
  Top Layer w8: v1(3620,3151) 3620,3174 3703.13,3257.13 R5.7@3743.19,3257.13 ; v1@4443.25,2362.75 4523.5,2443 4523.5,2531.5 4573,2581 4610.5,2581 U14.2@4624.19,2543.39
  Bottom Layer w8: 3484.9,2522.6 3413,2594.5 3413,2750.5 3354,2809.5 3354,2861.5 3467.5,2975 3507,2975 3516.22,2984.22 ; 3485.4,2522.6 3763,2245 4324.5,2245 4394,2314.5 ; 3516.22,2984.5 3533.5,3001.78 3533.5,3026.5 3620.36,3113.36 v1@3620.36,3150.36 ; 4394,2315 v1@4438.5,2359.5
  other v1: 4442.5,2359.5
BUMP5: R5.8 U15.2 | length 2037.8
  Top Layer w8: v1@3696,3213 3724.38,3241.38 R5.8@3743.19,3241.38 ; v1(5142,3348) 5237.78,3252.22 5237.78,3167.22 5293.52,3111.48 5304.35,3111.48 U15.2@5314.4,3105
  Bottom Layer w8: v1(3697,3208) 3740,3251 3898.97,3251 3933.47,3285.5 4164.13,3285.5 4191,3312.37 4191,3415 4234,3458 4295.92,3458 4301.82,3463.9 4326.18,3463.9 4332.08,3458 ; 4334,3457 4459,3457 4528,3388 5102,3388 v1(5142,3348)
BUMP6: U1.3 U16.2 | length 2479.4
  Top Layer w8: U1.3@4064.43,3485.47 4253.47,3485.47 4446,3678 4797,3678 4827,3648 v1@4835,3648 ; v1@5219,4953.5 5219,4931 5274,4872 U16.2@5303.4,4890 ; U16.2@5299.5,4895 5314.4,4895 U16.2@5304.4,4888.47
  Bottom Layer w8: v1@4836,3649 4845.5,3649 4921.5,3725 4921.5,4560.5 5123.5,4762.5 5123.5,4865.5 5138,4880 ; 5138.5,4880 v1@5202.5,4944
  other v1: 4836,3647 5213.5,4953.5
BUMP7: U1.2 U17.2 | length 3175.7
  Top Layer w8: U1.2@4064.43,3465.79 4144,3466 ; 4145,3466 4256.63,3466 4452.63,3662 4751.5,3662 v1@4765.5,3648 ; v1@4479,5417.5 v1(4487,5417.5) ; v1@4492,5418.5 4531.5,5451 U17.2@4545.8,5486.03 ; v1@4733.5,4742 4887,4588.5 v1@4887,4523.5
  Bottom Layer w8: v1@4479,5417.5 v1(4487,5417.5) ; v1@4486.5,5412 4501,5397.5 4784.5,5397.5 4896.5,5285.5 4896.5,4888.5 4753.5,4745.5 v1@4733.5,4745.5 ; v1@4773,3652 4887.5,3766.5 v1@4887.5,4524.5
  other v1: 4768.5,3648 4887.5,4522.5 4730.5,4744
BUMP_PWR: C13.2 C14.2 C15.2 C16.2 C17.2 C18.2 C19.2 C20.2 C30.2 Q1.3 R31.2 R32.2 R33.2 R34.2 R35.2 R36.2 R37.2 R38.2 U10.3 U11.3 U12.3 U13.3 U14.3 U15.3 U16.3 U17.3 | length 11935.2
  Top Layer w15: v1(2440,3187) v1@2452,3187 ; v1@2454,3186 2480,3186 R33.2@2480,3230.53 ; v1(2585,3186) 2585,3062 2663,2984 2663,2897.5 2635,2869.5 2635,2739 3020,2354 3144,2354 3262,2236 4370.5,2236 4596,2461.5 ; v1@2659.5,3187 U12.3@2671.6,3153.3 ; C14.2@2685,4715.31 R32.2@2725.69,4715.31 ; U11.3@2721.29,4932.71 2747.5,4919 2794.5,4919 ; R32.2@2739,4713 2795.5,4713 2795.5,5134 3040.5,5379 3274.5,5379 v1(3350,5454.5) ; 3157,2347 3304,2494 U13.3@3327.22,2556.07 ; U13.3@3329.28,2559.99 3329.28,2566.43 3335.4,2572.55 3335.4,2580.9 3354,2599.5 C16.2@3354,2615 ; C16.2@3354.69,2615 3371,2615 3379.53,2623.53 R34.2@3379.53,2660 ; U10.3@3500.03,5510.72 3502.62,5503.66 3513.4,5474.23 v1@3518.36,5467.15 ; v1@3531.5,5465 3576.5,5464 C13.2@3576.19,5433.5 ; R31.2@3547.03,5383.5 3575.5,5384 C13.2@3575.5,5429.5 ; 3579,5405.5 v1@3685,5405.5 ; C30.2@4262.5,3803.5 4290,3803.5 4290,3701 4420,3701 ; v1@4343,5470.5 4370.17,5470.5 R38.2@4370.17,5507.33 ; R38.2@4368.81,5523.69 C20.2@4368.81,5564 ; 4370.17,5465.33 4470,5365.5 v1(4494,5365.5) ; 4421,3697.5 4885.5,3697.5 5266.5,3316.5 R36.2@5266.5,3285 ; v1@4495.66,5363.93 4550.43,5421.82 4574.5,5422.49 U17.3@4592.78,5468.93 ; U14.3@4578.81,2521.87 4596,2468 ; 4596,2464.5 4690.5,2464.5 4776.19,2550.19 C17.2@4776.19,2602.5 ; v1@4760.25,5356.75 5251.5,4865.5 R37.2@5251.5,4814.5 ; C17.2@4776.03,2610.97 R35.2@4776.03,2647.5 4811.5,2647.5 ; 4811,2647.5 5007.5,2647.5 v1(5312.5,2952.5) ; R37.2@5255.5,4816 5296,4816 5296,4833 5310,4833 5329.3,4845.28 U16.3@5339.4,4851.7 ; R36.2@5277.69,3282.19 C18.2@5314,3282.19 ; U15.3@5288.92,3060.85 5274.85,3060.85 5259,3045 5259,3001.5 v1@5308,2952.5 ; C18.2@5322.5,3283.5 5358.5,3283.5 v1(5415.5,3226.5) ; U16.3@5342,4849 5389,4802 v1(5420,4802)
  Bottom Layer w15: v1(2440,3187) v1@2452,3187 ; v1@2453.5,3185.5 v1@2582.5,3185.5 ; v1(2585,3186) v1@2652,3186 ; v1(3350,5454.5) 3496.5,5454.5 v1@3515,5464 ; v1(3686.5,5407) 3751.5,5472 v1@4328,5472 ; v1@4495,5366.5 4501,5360.5 4753.5,5360.5 v1@4760,5367 ; v1@4949,3633 5004.5,3688.5 5004.5,4539.5 5213.5,4748.5 5309,4749.5 5368,4749.5 v1@5419.75,4801.25 ; v1(5312.5,2952.5) 5413,3053 v1@5413,3215 ; v1@5415.5,3217.5 v1(5415.5,3226.5)
  other v1: 2658.5,3188.5 4948,3633 4759,5361.5 3521,5469 4340,5473.5
BUMP_PWR_ENABLE: R43.1 U1.8 | length 148.6
  Top Layer w8: U1.8@4066.53,3583.9 4126,3583.9 R43.1@4126,3673
CHARGE_LIMIT_LIM1: R50.2 U1.32 U2.14 | length 1101.2
  Top Layer w8: U1.32@4034.9,3416.57 4034.9,3390.4 ; 4035.5,3391 4034.9,3390.4 ; v1@4058,3339.5 4033.1,3364.4 4033.1,3388.6 4034.9,3390.4 ; v1(4125.5,3416) 4149.5,3440 4213,3440 ; R50.2@4213,3406.47 4213,3435.5 v1@4313,3435.5 ; v1@4793,3358.5 4819,3332.5 4819,3263.65 4810.74,3255.38 ; U2.14@4810.53,3228.68 4810.53,3255.38
  Bottom Layer w8: v1(4058,3333.5) 4094,3333.5 4125.5,3365 v1(4125.5,3416) ; v1(4314,3434.5) 4453.5,3434.5 4532.5,3355.5 v1@4791.5,3355.5
  other v1: 4793,3357.5
CHRG: J1.14 R20.1 U2.16 | length 2934.7
  Top Layer w8: J1.14@4001,5198.02 v1@4001,5291 ; v1@4498.5,4963.5 4542.53,4919.47 R20.1@4574,4919.47 ; v1@4622,3606 4614,3602 4608,3596 4608,3371 4632.5,3346.5 4724.5,3346.5 4762.5,3308.5 4762.5,3266 4771.16,3257.34 U2.16@4771.16,3228.68 ; v1@4622.5,4744 v1@4631,4735.5 ; v1@4625,4634.5 v1@4625,4735.5
  Bottom Layer w8: v1@4001,5294 4001,5320 4022,5341 4339,5341 4363,5317 4363,5096 v1@4494.75,4964.25 ; v1@4493.75,4964.75 4622.5,4836 v1@4622.5,4743 ; v1@4617.14,3609.34 v1@4620.5,3601.5 ; v1@4621,4633.5 4608.5,4621 4608.5,3633 v1@4626.53,3614.97
  other v1: 4624.5,3612.5 4625.5,4636 4626.5,4743 4500,4963.5 3999,5292
FTDI_RESET: J1.12 U1.24 | length 2452.5
  Top Layer w8: v1@3774.5,3430 3793.5,3430 3810,3446.5 U1.24@3867.18,3446.5 ; J1.12@3947,5199 v1(3947,5288) ; v1@4009,3810.5 4018,3810.5 4038.5,3790 v1@4038.5,3720
  Bottom Layer w8: v1@3770.5,3431.5 3757.5,3431.5 3699.5,3489.5 3689,3489.5 3664,3514.5 3664,3544 3684.1,3564.1 3786.59,3564.1 ; 3788,3565 3864.5,3641.5 3974.5,3641.5 4033.5,3700.5 v1@4033.5,3720 ; v1@3946.5,5288 3946.5,4762 3990.8,4717.7 3990.8,4000.2 3957,3966.4 3957,3839.5 3986.5,3810 v1@3997.5,3810
  other v1: 3771,3431.5 4029,3710 4005.5,3810